# Altium PCB Current_sens.PcbDoc
Units mm, origin at the board's own origin, x right, y up, seen from the top; angles counter-clockwise.
Board outline 43.7 x 33.45 mm, 2 copper layers (Top Layer, Bottom Layer); 5 components, 7 nets, 21 pads, 35 vias.
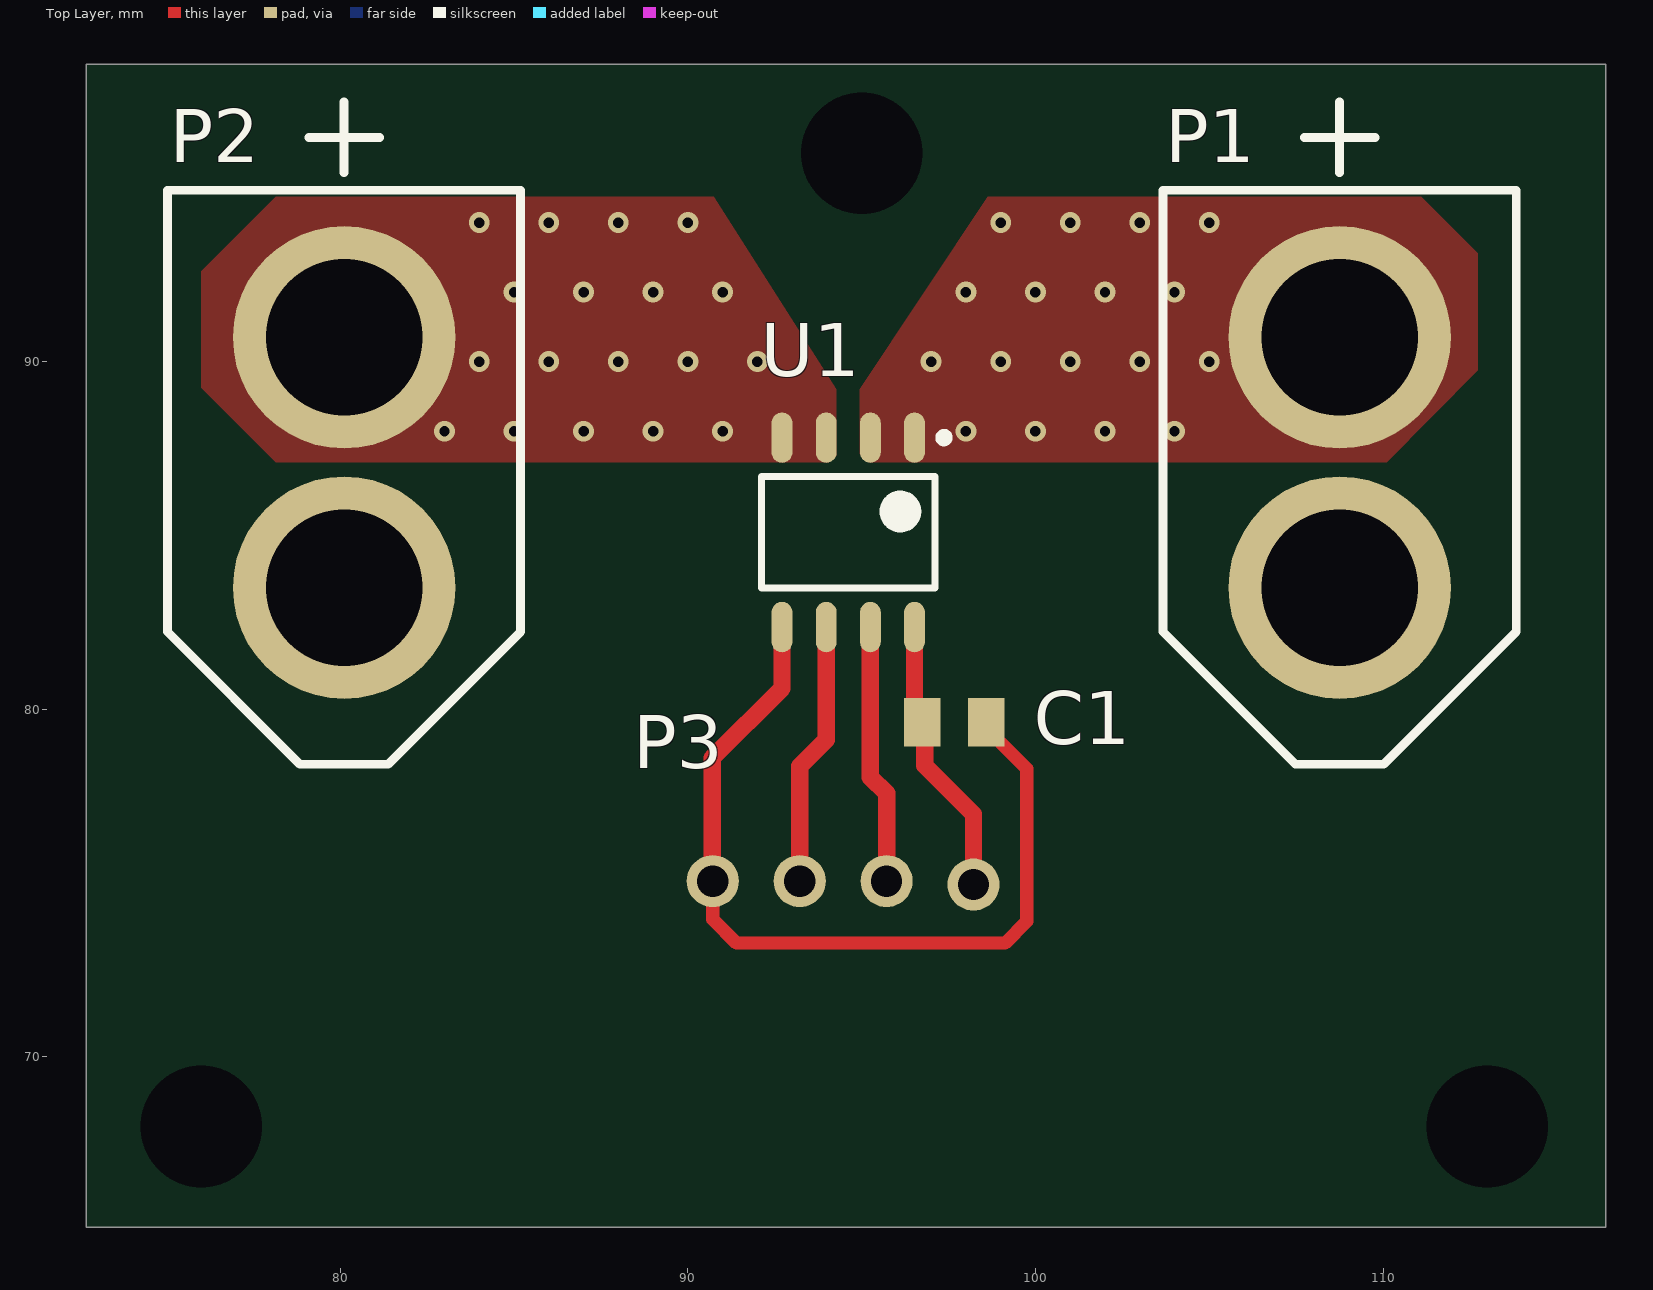
[diagram p0: Top Layer view]
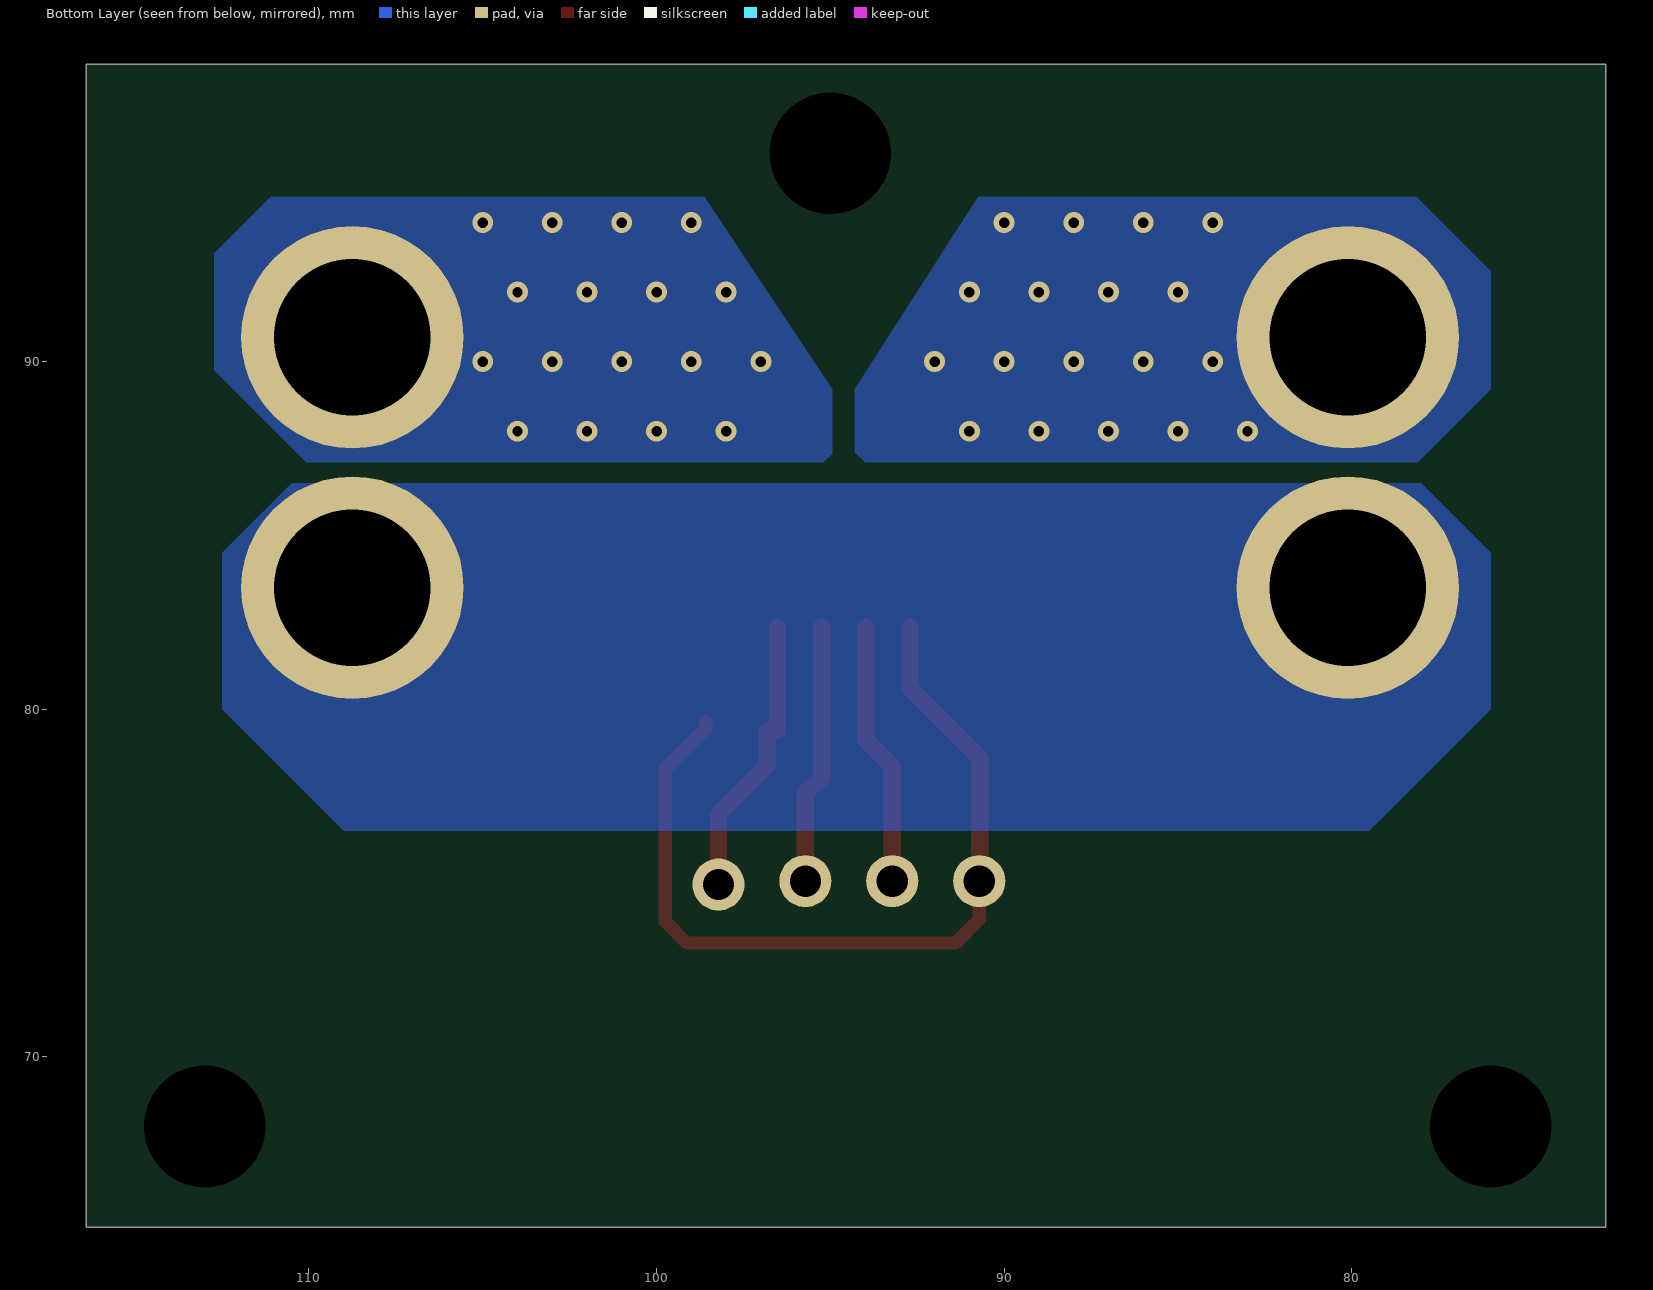
[diagram p1: Bottom Layer view, seen from below]
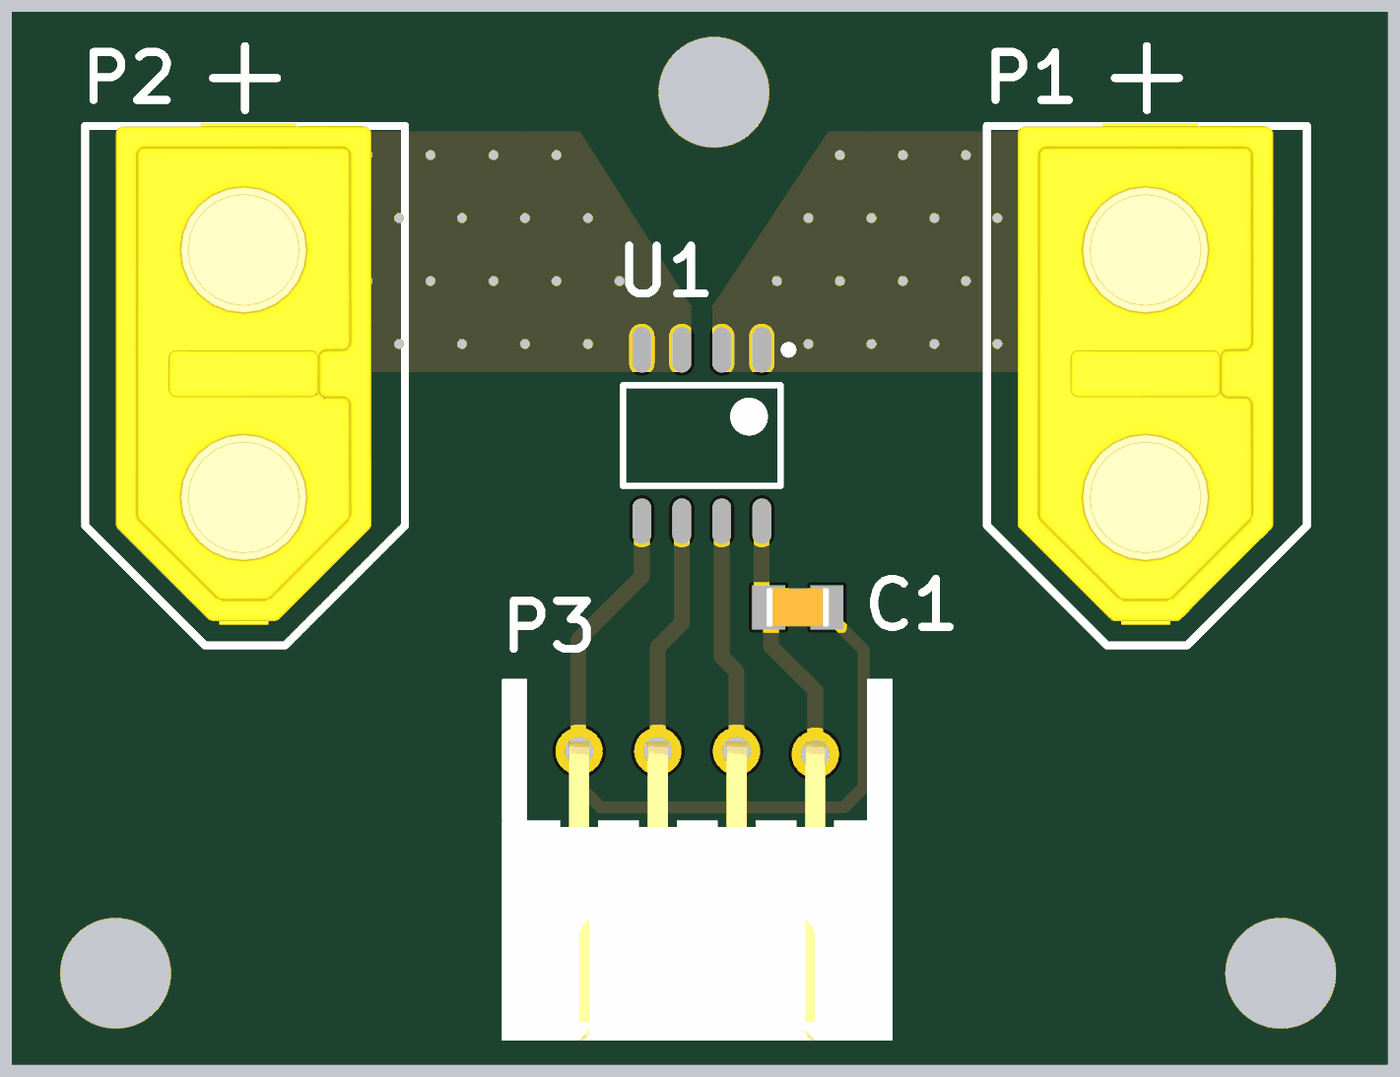
[diagram p2: 3D render of the assembled board from above, using the file's embedded part models]

## Layer stack, top to bottom
Top Solder: solder mask 0.0102, Solder Resist, Dk 3.5
Top Layer: signal copper 0.0356
Dielectric 1: dielectric 0.32, FR-4, Dk 4.8
Bottom Layer: signal copper 0.0356
Bottom Solder: solder mask 0.0102, Solder Resist, Dk 3.5

## Board outline
72.7,65.1 116.4,65.1 116.4,98.55 72.7,98.55

## Design rules (kind name [scope] priority, off if disabled: settings)
Clearance [All] p1: gap=0.254 ignorepadtopadclearanceinfootprint=FALSE except(0: Arc-Hole Track-Hole SMDPad-Hole THPad-Hole Via-Hole Fill-Hole Poly-Hole Region-Hole Text-Hole)
PlaneConnect PlaneConnect_1 [All] p1: pad.planeconnectstyle=Relief pad.reliefexpansion=0.508 pad.reliefentries=4 pad.reliefconductorwidth=1 pad.reliefairgap=0.254 via.planeconnectstyle=Direct via.reliefexpansion=0.508 via.reliefentries=4 via.reliefconductorwidth=0.254 via.reliefairgap=0.254
PlaneConnect [All] p2: pad.planeconnectstyle=Relief pad.reliefexpansion=0.508 pad.reliefentries=4 pad.reliefconductorwidth=0.254 pad.reliefairgap=0.254 via.planeconnectstyle=Direct via.reliefexpansion=0.508 via.reliefentries=4 via.reliefconductorwidth=0.254 via.reliefairgap=0.254
PolygonConnect Polygon_Custom [HasFootprint('XT-60')] p1: connectstyle=Direct reliefconductorwidth=0.254 reliefentries=4 polygonreliefangle="90 Angle" airgapwidth=0.254
PolygonConnect Polygon_Custom_1 [HasFootprint('SOIC-8')] p2: thpad.connectstyle=Direct thpad.reliefconductorwidth=0.254 thpad.reliefentries=4 thpad.polygonreliefangle="90 Angle" thpad.airgapwidth=0.254 smdpad.connectstyle=Direct smdpad.reliefconductorwidth=1 smdpad.reliefentries=4 smdpad.polygonreliefangle="90 Angle" smdpad.airgapwidth=0.254 via.connectstyle=Relief via.reliefconductorwidth=0.254 via.reliefentries=4 via.polygonreliefangle="90 Angle" via.airgapwidth=0.254
PolygonConnect [All] p3: thpad.connectstyle=Relief thpad.reliefconductorwidth=0.254 thpad.reliefentries=4 thpad.polygonreliefangle="90 Angle" thpad.airgapwidth=0.254 smdpad.connectstyle=Relief smdpad.reliefconductorwidth=0.254 smdpad.reliefentries=4 smdpad.polygonreliefangle="90 Angle" smdpad.airgapwidth=0.254 via.connectstyle=Direct via.reliefconductorwidth=0.254 via.reliefentries=4 via.polygonreliefangle="90 Angle" via.airgapwidth=0.254
RoutingVias [All] p1: holewidth=0.711 width=1.27 viastyle="Through Hole" minholewidth=0.711 minwidth=1.27 maxholewidth=0.711 maxwidth=1.27
SolderMaskExpansion [All] p1: expansion=0.102 istentingtop=FALSE
Width [All] p1: maxlimit=100 minlimit=0.254 preferedwidth=0.254
29 further rules are at their usual default settings.

## Classes and differential pairs
component class Current_sens: C1 P2 P3 U1

## Components (designator, comment, footprint, x,y, rotation, side; value= is the part's Value field where it differs from the comment)
C1 "SMD" C_SMD_0805_pcb 97.663,79.629 r0 top value=100n
P1 "XT-60" XT-60 108.75,83.5 r0 top
P2 "XT-60" XT-60 80.111,83.5 r0 top
P3 "JST_SE_4PIN" JST_SE_4PIN 88.318,71.657 r0 top
U1 "TMSC1100A1" SOIC-8 94.615,85.09 r270 top

## Footprints (in the part's own frame and the unit in brackets; to place one, negate y for a bottom-side part, rotate by r counter-clockwise, add the part's x,y. Pads: shape width x height; smd on the part's side, far side on the other; paste and mask are expansions set on the pad)
C_SMD_0805_pcb [mm] "Chip Capacitor, 2-Leads, Body 2,00x1,25mm, IPC Medium Density"
  rect 1.05x1.4 smd: 1(-0.925,0) 2(0.925,0)
  body extent -1,-0.63 1,0.62, height 1.35
JST_SE_4PIN [mm]
  round 1.5 hole 0.9: 1(9.9,3.3) 2(7.4,3.4) 3(4.9,3.4) 4(2.4,3.4)
  body extent -0.05,-5.8 12.35,5.7, height 6.1
SOIC-8 [mm] "SOIC, 8-Leads, Body 4,91x3,90mm, Pitch 1,27mm, IPC Medium Density"
  oval 1.45x0.6 smd: 1(-2.725,1.905) 2(-2.725,0.635) 3(-2.725,-0.635) 4(-2.725,-1.905) 5(2.725,-1.905) 6(2.725,-0.635) 7(2.725,0.635) 8(2.725,1.905)
  silkscreen extent -2.85,-2.5 1.6,2.88, body extent -2,-2.5 2,2.5, height 1.75
XT-60 [mm]
  round 6.4 hole 4.5: 1(0,7.2) 2(0,0)
  silkscreen extent -5.08,-5.08 5.08,13.97, body extent -4.11,-4.41 4.02,11.52, height 15.5

## Part data
C1: library part C_SMD_0805
P1 P2: Supplier Part Number 1=1568-1816-ND, Supplier Link 1=https://www.digikey.com/product-detail/en/sparkfun-electronics/PRT-10474/1568-1816-ND/8258064
P3: Supplier Part Number 1=455-2243-ND, Supplier Link 1=https://www.digikey.com/product-detail/en/jst-sales-america-inc/S4B-XH-A-LF-SN/455-2243-ND/1651041
U1: Part_name=TMCS1100A1

## Free pads (board coordinates)
  round 1.524 hole 3.5: 5(113,68) 6(76,68) 7(95,96)

## Via types
v1: diameter 0.6, hole 0.3, Top Layer to Bottom Layer, tented both sides, 35 vias

## Nets (pads, with @x,y where several pads share a name; then routed paths per layer and width w, separated by ;. In a path a pad name is that pad's centre, name@x,y a point inside that pad or via, vN(x,y) a via of type N, cw(c..) or ccw(c..) an arc to the next point about the centre after c; other vN are vias at no path point)
+5: C1.1 P3.1 U1.8 | length 8.3
  Top Layer w0.5: U1.8 96.52,79.375 96.817,79.375 96.817,78.383 98.218,76.982 P3.1
GND: P1.2 P2.2
NetP1_1: P1.1 U1.1 U1.2
  other v1: 98,88 100,88 102,88 104,88 97,90 99,90 101,90 103,90 105,90 98,92 100,92 102,92 104,92 99,94 101,94 103,94 105,94
NetP2_1: P2.1 U1.3 U1.4
  other v1: 83,88 85,88 87,88 89,88 91,88 84,90 86,90 88,90 90,90 92,90 85,92 87,92 89,92 91,92 84,94 86,94 88,94 90,94
NetP3_2: P3.2 U1.7 | length 7.5
  Top Layer w0.5: U1.7 95.25,78.05 95.718,77.582 P3.2
NetP3_3: P3.3 U1.6 | length 7.6
  Top Layer w0.5: P3.3 93.218,78.301 ; 93.218,78.359 93.98,79.121 U1.6
SIG_GND: C1.2 P3.4 U1.5 | length 25
  Top Layer w0.381: P3.4 90.718,73.957 91.4,73.275 99.125,73.275 99.75,73.9 99.75,78.292 98.588,79.454 C1.2
  Top Layer w0.5: P3.4 90.7,75.075 90.7,78.6 92.71,80.61 U1.5

## Polygon pours and split planes (outlines as drawn)
NetP1_1 on Top Layer "NETP1_1_L01_P001" (solid, pour order 1): 95.2,87.1 110.1,87.1 112.725,89.75 112.725,90.2 112.725,93.125 111.1,94.75 98.625,94.75 94.95,89.2 94.95,87.35
NetP2_1 on Top Layer "NETP2_1_L01_P000" (solid, pour order 0): 94.05,87.1 78.15,87.1 76,89.25 76,92.6 78.15,94.75 90.75,94.75 94.275,89.211 94.275,87.3
GND on Bottom Layer "GND_L02_P007" (solid, pour order 7): 76,84.5 76,80 79.5,76.5 109,76.5 112.5,80 112.5,84.5 110.5,86.5 78,86.5
NetP1_1 on Bottom Layer "NETP1_1_L02_P004" (solid, pour order 4): 94.95,87.35 95.2,87.1 110.075,87.1 112.75,89.775 112.725,89.8 112.725,93.125 111.1,94.75 98.625,94.75 94.95,89.2
no net on Bottom Layer "NONET_L02_P005" (solid, pour order 5): 94.975,89.775
NetP2_1 on Bottom Layer "NETP2_1_L02_P003" (solid, pour order 3): 94,87.1 94.3,87.4 94.3,89.2 91.523,93.538 90.748,94.749 78.149,94.749 76,92.6 76,89.2 78.1,87.1

## Silkscreen, mask and mechanical layers (free items; w line width, h text height)
Mechanical 1:
  lines w0.254: 72.85,65.25 116.25,65.25 116.25,98.4 72.85,98.4 72.85,65.25